# EAGLE board Mainboard - Prototyp 2 (EAGLE 7.2.0)
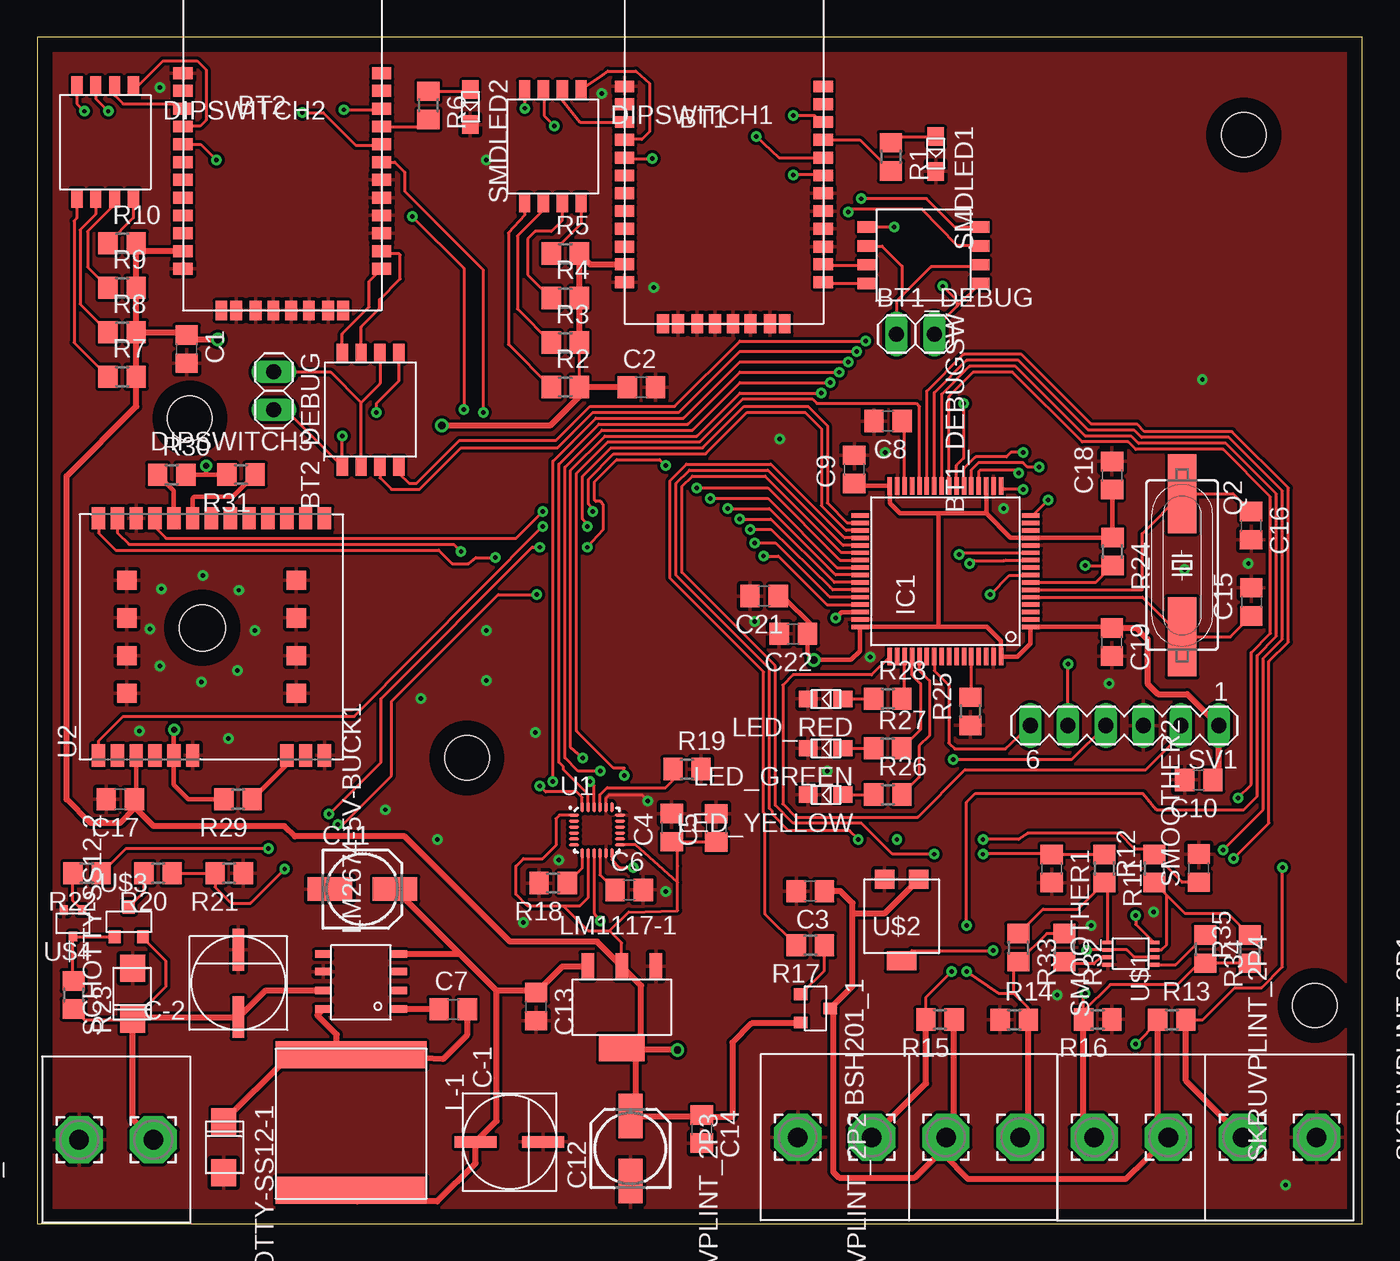
[diagram p0: board, top side]
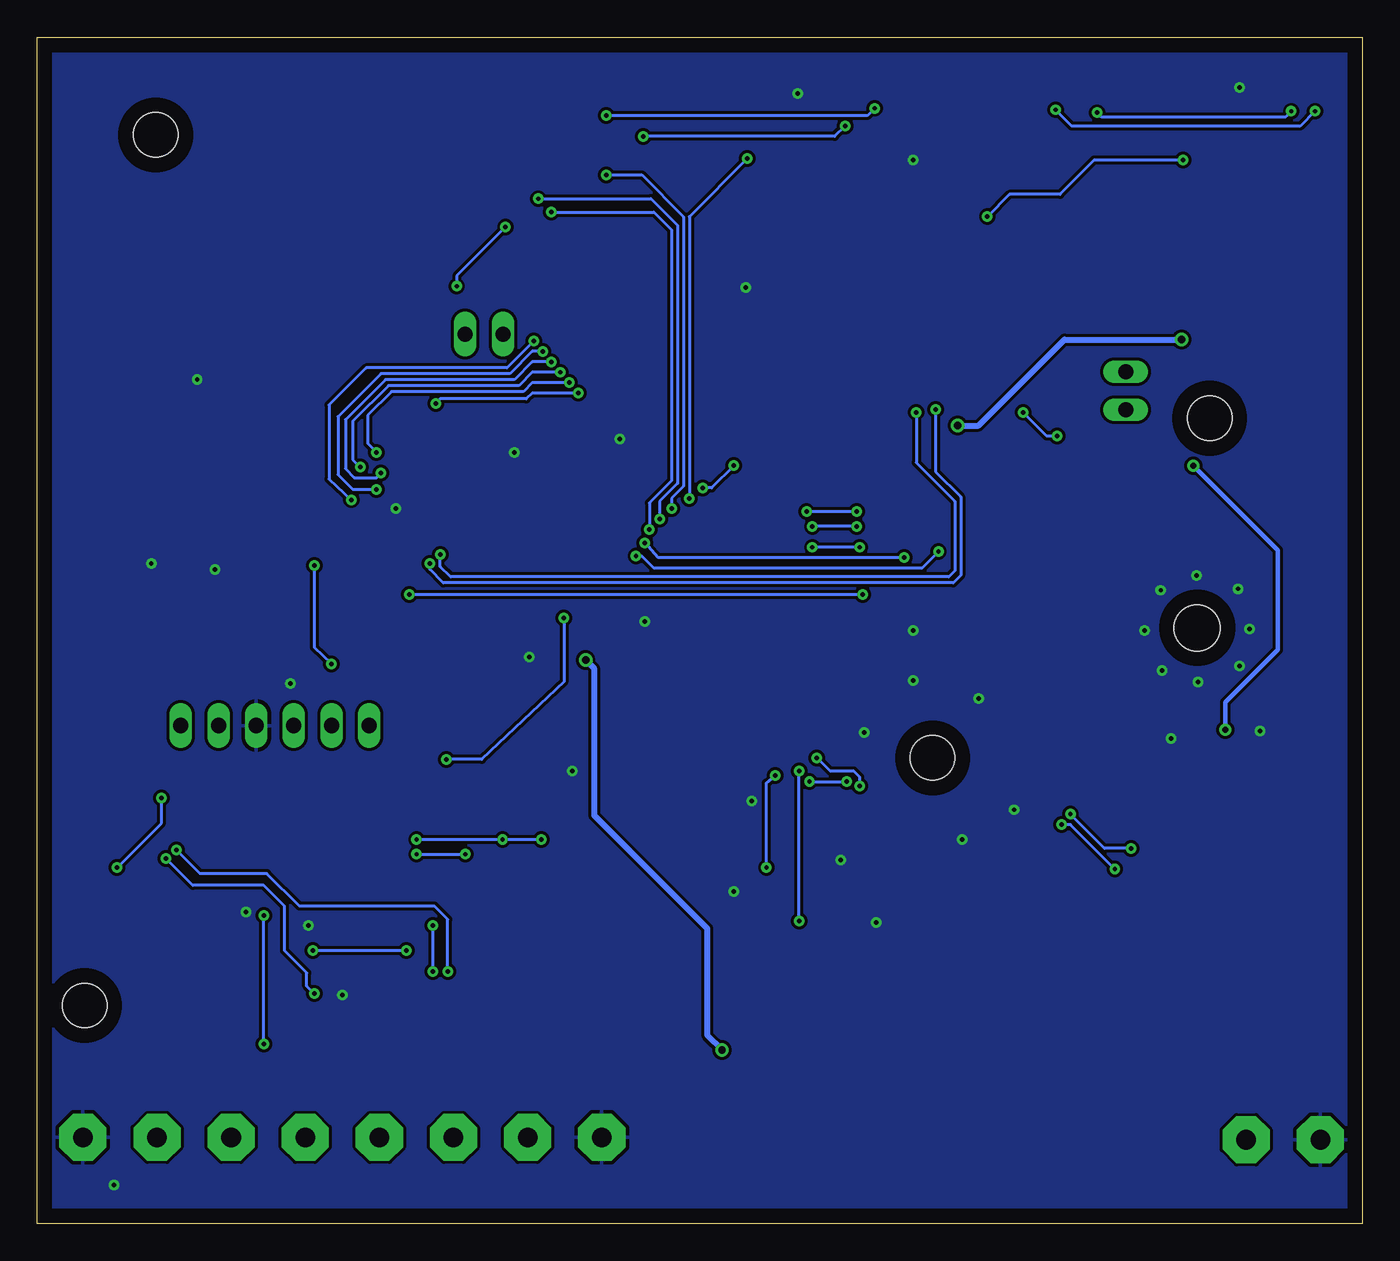
[diagram p1: board, bottom side, seen from below]

Size 89.4 x 80 mm. Coordinates in mm from the lower left corner, seen from the top.
Outline: 0,0 89.4,0 89.4,80 0,80 0,0
Copper layers (1*16): Top 0.035mm / dielectric 1.5mm / Bottom 0.035mm
Design rules "default *": minimum track width 0.2mm, minimum drill 0.3mm, track to track 0.2mm, track to pad 0.2mm, pad to pad 0.2mm, via to via 0.2mm, smd to smd 0mil, copper to edge 40mil, drill to drill 8mil, minimum pad ring 10mil, minimum via ring 8mil, stop-mask expansion 4mil, vias tented up to drill 0mil, thermal gap 10mil
Holes 3 mm at 29,31.4 81.4,73.4 86.2,14.7 10.3,54.3

## Footprints (pad centres in the part's own frame; a part is rotated, then mirrored left to right if it is on the bottom)
P-CHANNEL = smd 0.8 x 0.9: DRAIN 0,1; GATE -0.95,-1; SOURCE 0.95,-1
RN42 = smd 1.3 x 0.8: 1 -6.7,3.2; 2 -6.7,2; 3 -6.7,0.8; 4 -6.7,-0.4; 5 -6.7,-1.6; 6 -6.7,-2.8; 7 -6.7,-4; 8 -6.7,-5.2; 9 -6.7,-6.4; 10 -6.7,-7.6; 11 -6.7,-8.8; 12 -6.7,-10; 13 6.7,-10; 14 6.7,-8.8; 15 6.7,-7.6; 16 6.7,-6.4; 17 6.7,-5.2; 18 6.7,-4; 19 6.7,-2.8; 20 6.7,-1.6; 21 6.7,-0.4; 22 6.7,0.8; 23 6.7,2; 24 6.7,3.2 | smd 0.8 x 1.3: 28 3.1,-12.8; 29 -3.1,-12.8; 30 4.1,-12.8; 31 1.8,-12.8; 32 0.6,-12.8; 33 -0.6,-12.8; 34 -1.8,-12.8; 35 -4.1,-12.8
1X02 = drill 1.016 long: 1 -1.27,0; 2 1.27,0
DIPSWITCH4P = smd 0.76 x 1.27: B1 0,0; B2 1.27,0; B3 2.54,0; B4 3.81,0; T1 0,7.62; T2 1.27,7.62; T3 2.54,7.62; T4 3.81,7.62
C0805 = smd 1.3 x 1.5: 1 -0.95,0; 2 0.95,0
153CLV-0505 = smd 3 x 1.6: + 2.2,0; - -2.2,0
CAP-6.3MM-DIA = smd 0.8 x 2.8: + 0,2.3; - 0,-2.25
LQFP64 = smd 0.3 x 1.2: 1 -3.75,-5.75; 2 -3.25,-5.75; 3 -2.75,-5.75; 4 -2.25,-5.75; 5 -1.75,-5.75; 6 -1.25,-5.75; 7 -0.75,-5.75; 8 -0.25,-5.75; 9 0.25,-5.75; 10 0.75,-5.75; 11 1.25,-5.75; 12 1.75,-5.75; 13 2.25,-5.75; 14 2.75,-5.75; 15 3.25,-5.75; 16 3.75,-5.75; 33 3.75,5.75; 34 3.25,5.75; 35 2.75,5.75; 36 2.25,5.75; 37 1.75,5.75; 38 1.25,5.75; 39 0.75,5.75; 40 0.25,5.75; 41 -0.25,5.75; 42 -0.75,5.75; 43 -1.25,5.75; 44 -1.75,5.75; 45 -2.25,5.75; 46 -2.75,5.75; 47 -3.25,5.75; 48 -3.75,5.75 | smd 1.2 x 0.3: 17 5.75,-3.75; 18 5.75,-3.25; 19 5.75,-2.75; 20 5.75,-2.25; 21 5.75,-1.75; 22 5.75,-1.25; 23 5.75,-0.75; 24 5.75,-0.25; 25 5.75,0.25; 26 5.75,0.75; 27 5.75,1.25; 28 5.75,1.75; 29 5.75,2.25; 30 5.75,2.75; 31 5.75,3.25; 32 5.75,3.75; 49 -5.75,3.75; 50 -5.75,3.25; 51 -5.75,2.75; 52 -5.75,2.25; 53 -5.75,1.75; 54 -5.75,1.25; 55 -5.75,0.75; 56 -5.75,0.25; 57 -5.75,-0.25; 58 -5.75,-0.75; 59 -5.75,-1.25; 60 -5.75,-1.75; 61 -5.75,-2.25; 62 -5.75,-2.75; 63 -5.75,-3.25; 64 -5.75,-3.75
INDUCTOR = smd 1.8 x 10.16: 1 0,0; 2 9.14,0
SMD_LED_CUSTOM = smd 1.25 x 1.1: 1 0,0; 2 2.35,0
LM1117 = smd 0.84 x 1.8: ADJ/GND 0,0; INPUT 4.6,0; OUTPUT 2.3,0 | smd 3.1 x 1.8: OUTPUT2 2.3,5.5
LM2674 = smd 0.51 x 1.1: 1 0,0; 2 1.27,0; 3 2.54,0; 4 3.72,0; 5 3.72,5.1; 6 2.54,5.1; 7 1.27,5.1; 8 0,5.1
HC49UP = smd 5.334 x 1.93: 1 -4.826,0; 2 4.826,0
R0805 = smd 1.3 x 1.5: 1 -0.95,0; 2 0.95,0
SCHOTTY = smd 1.8 x 1.68: + 3.46,0; - 0,0
SKRUVPLINT_2P = drill 1.321 pad 3.175 octagon: 3 0,5; 4 0,0
MA06-1 = drill 1.016 long: 1 -6.35,0; 2 -3.81,0; 3 -1.27,0; 4 1.27,0; 5 3.81,0; 6 6.35,0
QFN40P300X300X105-25N = smd 0.7 x 0.2: 1 -1.55,1; 2 -1.55,0.6; 3 -1.55,0.2; 4 -1.55,-0.2; 5 -1.55,-0.6; 6 -1.55,-1; 13 1.55,-1; 14 1.55,-0.6; 15 1.55,-0.2; 16 1.55,0.2; 17 1.55,0.6; 18 1.55,1 | smd 0.2 x 0.7: 7 -1,-1.55; 8 -0.6,-1.55; 9 -0.2,-1.55; 10 0.2,-1.55; 11 0.6,-1.55; 12 1,-1.55; 19 1,1.55; 20 0.6,1.55; 21 0.2,1.55; 22 -0.2,1.55; 23 -0.6,1.55; 24 -1,1.55
XCVR_A2235-H = smd 1.5 x 0.9: 1 -8,7.62; 2 -8,6.35; 3 -8,5.08; 4 -8,3.81; 5 -8,2.54; 6 -8,1.27; 7 -8,-5.08; 8 -8,-6.35; 9 -8,-7.62; 10 8,-7.62; 11 8,-6.35; 12 8,-5.08; 13 8,-3.81; 14 8,-2.54; 15 8,-1.27; 16 8,0; 17 8,1.27; 18 8,2.54; 19 8,3.81; 20 8,5.08; 21 8,6.35; 22 8,7.62 | smd 1.3 x 1.3: 23 -3.81,5.715; 24 -1.27,5.715; 25 1.27,5.715; 26 3.81,5.715; 27 -3.81,-5.715; 28 -1.27,-5.715; 29 1.27,-5.715; 30 3.81,-5.715 | hole 3.1: 0.605,0.63
VSSOP = smd 0.25 x 0.75: P$1 -0.75,-1.55; P$2 -0.25,-1.55; P$3 0.25,-1.55; P$4 0.75,-1.55; P$5 0.75,1.55; P$6 0.25,1.55; P$7 -0.25,1.55; P$8 -0.75,1.55
POT = smd 1.3 x 1.3: P$1_A 1.15,0; P$3_C -1.15,0 | smd 2 x 1.3: P$2_B 0,5.5
SOT-323 = smd 0.559 x 0.648: DRAIN 0,0.895; GATE -0.623,-0.895; SOURCE 0.623,-0.895

## Placement (x,y rotation side)
BSH201_1  BSH201  [P-CHANNEL]  52.5,14.5 270 top
BT1  BLUETOOTH-RN42  [RN42]  46.33,73.47 0 top
BT1_DEBUG  [1X02]  59.25,59.97 0 top
BT1_DEBUGSW  DIPSWITCH_4P  [DIPSWITCH4P]  55.98,67.19 270 top
BT2  BLUETOOTH-RN42  [RN42]  16.54,74.37 0 top
BT2_DEBUG  [1X02]  15.97,56.15 270 top
C1  100n  [C0805]  10.09,58.96 270 top
C2  100n  [C0805]  40.76,56.39 0 top
C3  100n  [C0805]  52.16,22.41 180 top
C4  100n  [C0805]  42.81,26.69 90 top
C5  10n  [C0805]  45.81,26.68 90 top
C6  100n  [C0805]  39.94,22.49 0 top
C7  0.01uF  [C0805]  28.07,14.44 0 top
C8  4u7  [C0805]  57.4,54.11 180 top
C9  100n  [C0805]  55.12,50.85 90 top
C10  100n  [C0805]  78.36,29.91 180 top
C11  10u  [153CLV-0505]  21.94,22.55 0 top
C12  10u  [153CLV-0505]  40.03,5.06 90 top
C13  100n  [C0805]  33.66,14.62 270 top
C14  100n  [C0805]  44.83,6.37 270 top
C15  25p  [C0805]  81.91,41.92 90 top
C16  25p  [C0805]  81.89,47.06 270 top
C17  100n  [C0805]  5.61,28.61 180 top
C18  100n  [C0805]  72.51,50.44 90 top
C19  100n  [C0805]  72.49,39.21 270 top
C21  1u  [C0805]  49.04,42.31 180 top
C22  100n  [C0805]  51.01,39.76 180 top
C-1  100uF  [CAP-6.3MM-DIA]  31.88,5.5 90 top
C-2  100uF  [CAP-6.3MM-DIA]  13.58,16.21 180 top
DIPSWITCH1  DIPSWITCH_4P  [DIPSWITCH4P]  32.88,68.82 0 top
DIPSWITCH2  DIPSWITCH_4P  [DIPSWITCH4P]  2.69,69.12 0 top
DIPSWITCH3  DIPSWITCH_4P  [DIPSWITCH4P]  24.4,58.68 180 top
IC1  STM32F401RBT  [LQFP64]  61.27,43.98 90 top
L-1  55uH  [INDUCTOR]  21.19,11.38 270 top
LED_GREEN  SMD_LED  [SMD_LED_CUSTOM]  54.36,32.05 180 top
LED_RED  SMD_LED  [SMD_LED_CUSTOM]  54.36,35.37 180 top
LED_YELLOW  SMD_LED  [SMD_LED_CUSTOM]  54.36,28.92 180 top
LM1117-1  LM1117  [LM1117]  41.74,17.34 180 top
LM2674-5V-BUCK1  LM2674-5VBUCK  [LM2674]  24.4,14.45 90 top
Q2  18p  [HC49UP]  77.23,44.39 270 top
R1  220  [R0805]  57.59,71.92 270 top
R2  1k  [R0805]  35.63,56.4 0 top
R3  1k  [R0805]  35.63,59.4 0 top
R4  1k  [R0805]  35.63,62.4 0 top
R5  1k  [R0805]  35.63,65.4 0 top
R6  220  [R0805]  26.39,75.4 270 top
R7  1k  [R0805]  5.74,57.1 0 top
R8  1k  [R0805]  5.74,60.1 0 top
R9  1k  [R0805]  5.74,63.1 0 top
R10  1k  [R0805]  5.74,66.1 0 top
R11  1k  [R0805]  71.99,23.94 270 top
R12  1k  [R0805]  75.36,23.94 90 top
R13  68  [R0805]  76.54,13.74 0 top
R14  4.7k  [R0805]  65.91,13.74 0 top
R15  68  [R0805]  60.91,13.76 180 top
R16  4.7k  [R0805]  71.54,13.76 180 top
R17  150  [R0805]  52.16,18.76 180 top
R18  0  [R0805]  34.81,22.96 180 top
R19  0  [R0805]  43.84,30.64 0 top
R20  6.8k  [R0805]  8.16,23.62 180 top
R21  3.3k  [R0805]  12.96,23.61 180 top
R22  1k  [R0805]  3.37,23.62 180 top
R23  10k  [R0805]  2.48,15.41 270 top
R24  10k  [R0805]  72.54,45.31 270 top
R25  10k  [R0805]  62.96,34.54 90 top
R26  220  [R0805]  57.39,28.92 0 top
R27  220  [R0805]  57.38,32.04 0 top
R28  220  [R0805]  57.39,35.39 0 top
R29  10k  [R0805]  13.56,28.61 180 top
R30  2k2  [R0805]  9.09,50.49 0 top
R31  2k2  [R0805]  13.76,50.51 180 top
R32  1k  [R0805]  69.3,18.6 270 top
R33  10k  [R0805]  66.2,18.6 270 top
R34  1k  [R0805]  78.8,18.5 270 top
R35  10k  [R0805]  81.8,18.5 90 top
SCHOTTY-SS12-1  SCHOTTY-SS12  [SCHOTTY]  12.6,6.88 270 top
SCHOTTY-SS12-2  SCHOTTY-SS12  [SCHOTTY]  6.46,13.75 90 top
SKRUVPLINT_2P1  SKRUVPLINT_2P  [SKRUVPLINT_2P]  86.31,5.81 90 top
SKRUVPLINT_2P2  SKRUVPLINT_2P  [SKRUVPLINT_2P]  61.31,5.81 270 top
SKRUVPLINT_2P3  SKRUVPLINT_2P  [SKRUVPLINT_2P]  51.31,5.81 270 top
SKRUVPLINT_2P4  SKRUVPLINT_2P  [SKRUVPLINT_2P]  76.31,5.81 90 top
SKRUVPLINT_2P5  SKRUVPLINT_2P  [SKRUVPLINT_2P]  2.84,5.65 270 top
SMDLED1  SMD_LED  [SMD_LED_CUSTOM]  60.62,73.29 270 top
SMDLED2  SMD_LED  [SMD_LED_CUSTOM]  29.22,76.45 270 top
SMOOTHER1  1n  [C0805]  68.44,23.94 270 top
SMOOTHER2  1n  [C0805]  78.36,23.96 90 top
SV1  [MA06-1]  73.35,33.58 180 top
U1  MPU-9250  [QFN40P300X300X105-25N]  37.77,26.53 0 top
U2  A2235-H  [XCVR_A2235-H]  11.77,39.56 90 top
U$1  TLV7256  [VSSOP]  73.77,18.2 270 top
U$2  TS53YL  [POT]  58.32,23.22 180 top
U$3  ZXMP10A13F  [P-CHANNEL]  6.19,20.34 0 top
U$4  SI1330EDL  [SOT-323]  2.42,20.24 180 top

## Library data of the parts
BSH201_1 = BSH201
BT1 BT2 = RN42
BT1_DEBUG BT2_DEBUG = pinhead
BT1_DEBUGSW DIPSWITCH1-DIPSWITCH3 = dipswitch4p_updated
C1-C19 C21 C22 R11-R25 R29-R35 SMOOTHER1 SMOOTHER2 = rcl
C-1 C-2 = panasonic-cap-100u
IC1 = E7020E
L-1 = inductor-55u
LED_GREEN LED_RED LED_YELLOW SMDLED1 SMDLED2 = greenled_smd
LM1117-1 = LM1117-3v3_vreg
LM2674-5V-BUCK1 = LM2674-5v-buck
Q2 = crystal; OC_FARNELL: unknown; OC_NEWARK: unknown
R1-R10 R26-R28 = resistor
SCHOTTY-SS12-1 SCHOTTY-SS12-2 = schotty-SS12
SKRUVPLINT_2P1-SKRUVPLINT_2P5 = skruvplint2p_CTB0700
SV1 = E7020E; OC_FARNELL: unknown; OC_NEWARK: unknown
U1 = MPU-9250; AVAILABILITY: Good; DESCRIPTION: SMD Gyroscope/Accelerometer/Magnetometer Sensor; 9-AXIS; MF: InvenSense; MP: MPU-9250; PACKAGE: QFN-24 InvenSense; PRICE: 6.71 USD
U2 = A2235-H; AVAILABILITY: Good; DESCRIPTION: Gps Module, Mini Outline w/ Ant; MF: Maestro Wireless; MP: A2235H; PACKAGE: None; PRICE: 15.70 USD
U$1 = TLV7256
U$2 = TS53YL
U$3 = ZXMP10A13F
U$4 = SI1330EDL

## Nets
1V8_VOUT: R29.2 R30.2 R31.2 U2.5
+3V3: BSH201_1.SOURCE BT1.11 BT2.11 C1.1 C2.1 C4.1 C5.1 C9.1 C10.1 C12.+ C14.1 C17.1 C18.1 C19.1 C21.1 C22.1 IC1.1 IC1.13 IC1.19 IC1.32 IC1.48 IC1.64 LM1117-1.OUTPUT LM1117-1.OUTPUT2 R2.2 R3.2 R4.2 R5.2 R7.2 R8.2 R9.2 R10.2 R24.1 SV1.1 U1.1 U1.8 U1.13 U2.3
+5V: C11.+ C13.1 C-1.+ L-1.2 LM1117-1.INPUT LM2674-5V-BUCK1.4
BAT_MEAS: IC1.8 R20.1 R21.2
BATMEAS_TOGGLE: IC1.39 R22.1
BATSUP: C-2.+ LM2674-5V-BUCK1.7 R23.2 SCHOTTY-SS12-2.- SKRUVPLINT_2P5.3 U$3.SOURCE
BT1_CONNSTATUS: BT1.19 IC1.41
BT1_DEBUGRX: BT1_DEBUG.2 BT1_DEBUGSW.B1 BT1_DEBUGSW.T4
BT1_DEBUGTX: BT1_DEBUG.1 BT1_DEBUGSW.B2 BT1_DEBUGSW.T3
BT1_GPIO3: BT1.20 DIPSWITCH1.T2
BT1_GPIO4: BT1.22 DIPSWITCH1.T1
BT1_GPIO6: BT1.3 DIPSWITCH1.T3
BT1_GPIO7: BT1.4 DIPSWITCH1.T4
BT1_RESET: BT1.5 IC1.40
BT1_RX: BT1.13 BT1_DEBUGSW.B4
BT1_TX: BT1.14 BT1_DEBUGSW.B3
BT2_CONNSTATUS: BT2.19 IC1.11
BT2_DEBUGRX: BT2_DEBUG.2 DIPSWITCH3.B1 DIPSWITCH3.T4
BT2_DEBUGTX: BT2_DEBUG.1 DIPSWITCH3.B2 DIPSWITCH3.T3
BT2_GPIO3: BT2.20 DIPSWITCH2.T2
BT2_GPIO4: BT2.22 DIPSWITCH2.T1
BT2_GPIO6: BT2.3 DIPSWITCH2.T3
BT2_GPIO7: BT2.4 DIPSWITCH2.T4
BT2_RESET: BT2.5 IC1.10
BT2_RX: BT2.13 DIPSWITCH3.B4
BT2_TX: BT2.14 DIPSWITCH3.B3
GND: BT1.1 BT1.12 BT1.15 BT1.16 BT1.17 BT1.18 BT1.28 BT1.29 BT1.31 BT1.32 BT1.33 BT1.34 BT2.1 BT2.12 BT2.15 BT2.16 BT2.17 BT2.18 BT2.28 BT2.29 BT2.31 BT2.32 BT2.33 BT2.34 C1.2 C2.2 C3.2 C4.2 C5.2 C6.2 C8.2 C9.2 C10.2 C11.- C12.- C13.2 C14.2 C15.2 C16.2 C17.2 C18.2 C19.2 C21.2 C22.2 C-1.- C-2.- IC1.12 IC1.18 IC1.31 IC1.47 IC1.63 LED_GREEN.2 LED_RED.2 LED_YELLOW.2 LM1117-1.ADJ/GND LM2674-5V-BUCK1.6 R14.1 R16.1 R18.2 R19.2 R21.1 R25.1 SCHOTTY-SS12-1.+ SCHOTTY-SS12-2.+ SKRUVPLINT_2P1.4 SKRUVPLINT_2P3.4 SKRUVPLINT_2P5.4 SMDLED1.2 SMDLED2.2 SMOOTHER1.2 SMOOTHER2.2 SV1.3 U1.11 U1.18 U1.20 U2.6 U2.9 U2.20 U2.23 U2.24 U2.25 U2.26 U2.27 U2.28 U2.29 U2.30 U$1.P$4 U$2.P$1_A U$4.SOURCE
GPS_NRST: IC1.34 U2.1
GPS_TOGGLE: IC1.35 U2.19
IMU_INT: IC1.28 U1.12
LED_GREEN: IC1.52 R27.2
LED_RED: IC1.51 R28.2
LED_YELLOW: IC1.53 R26.2
MCURX1_BT1TX: BT1_DEBUGSW.T2 IC1.43
MCURX2_BT2TX: DIPSWITCH3.T2 IC1.17
MCURX6_GPSTX: IC1.45 U2.21
MCUTX1_BT1RX: BT1_DEBUGSW.T1 IC1.42
MCUTX2_BT2RX: DIPSWITCH3.T1 IC1.16
MCUTX6_GPSRX: IC1.44 U2.22
N$1: BT1.21 R1.2
N$2: DIPSWITCH1.B1 R2.1
N$3: DIPSWITCH1.B2 R3.1
N$4: DIPSWITCH1.B3 R4.1
N$5: DIPSWITCH1.B4 R5.1
N$6: BT2.21 R6.2
N$7: DIPSWITCH2.B1 R7.1
N$8: DIPSWITCH2.B2 R8.1
N$9: DIPSWITCH2.B3 R9.1
N$10: DIPSWITCH2.B4 R10.1
N$11: R6.1 SMDLED2.1
N$12: R1.1 SMDLED1.1
N$13: R11.2 R33.1 U$1.P$1
N$14: U$1.P$2 U$1.P$6 U$2.P$2_B
N$15: R12.1 R35.2 U$1.P$7
N$16: R29.1 U2.7
N$17: R30.1 U2.18
N$18: BSH201_1.GATE R17.1
N$19: C6.1 U1.10
N$20: R18.1 U1.7
N$21: R19.1 U1.21
N$22: C7.1 LM2674-5V-BUCK1.1
N$23: R20.2 U$3.DRAIN
N$24: R22.2 U$4.GATE
N$25: R23.1 U$3.GATE U$4.DRAIN
N$26: C8.1 IC1.30
N$27: IC1.60 R25.2
N$28: C15.1 IC1.5 Q2.2
N$29: C16.1 IC1.6 Q2.1
N$30: LED_YELLOW.1 R26.1
N$31: LED_GREEN.1 R27.1
N$32: R31.1 U2.17
N$33: LED_RED.1 R28.1
N$34: R32.2 U$1.P$3
N$35: R34.1 U$1.P$5
NRST: IC1.7 R24.2 SV1.5
OPTO1_DIODE: IC1.24 R13.2 SKRUVPLINT_2P1.3
OPTO1_OUT: IC1.38 R11.1 SMOOTHER1.1
OPTO1_TRAN: IC1.25 R14.2 R32.1 R33.2 SKRUVPLINT_2P2.3
OPTO2_DIODE: IC1.26 R15.2 SKRUVPLINT_2P3.3
OPTO2_OUT: IC1.37 R12.2 SMOOTHER2.1
OPTO2_TRAN: IC1.27 R16.2 R34.2 R35.1 SKRUVPLINT_2P4.3
OPTO_TOGGLE: IC1.36 R17.2
OPTO_VDD: BSH201_1.DRAIN C3.1 R13.1 R15.1 SKRUVPLINT_2P2.4 SKRUVPLINT_2P4.4 U$1.P$8 U$2.P$3_C
RESV: U1.19
SPI1_MISO: IC1.22 U1.9
SPI1_MOSI: IC1.23 U1.24
SPI1_NSS: IC1.20 U1.22
SPI1_SCK: IC1.21 U1.23
SWCLK: IC1.49 SV1.2
SWDIO: IC1.46 SV1.4
SWO: IC1.55 SV1.6
VANT: U2.11
VOUT: C7.2 L-1.1 LM2674-5V-BUCK1.8 SCHOTTY-SS12-1.-

## Tracks (layer width: path | path; a pad name or v marks a point on that pad's centre or on a via)
1V8_VOUT  (via drill 0.4)
  Top 0.3: R29.2 10.19,28.61 9.23,29.57 U2.5 | 9.4,31.39 U2.5 | U2.5 v9.23,33.28 v9.24,33.29 | 11.4,50.49 R30.2 10.09,50.49 10.1,50.5 | 11.4,50.49 12.79,50.49 R31.2 | v11.4,51.1 11.4,50.49
  Bottom 0.3: v9.24,33.29 9.24,35.16 5.7,38.7 5.7,45.4 v11.4,51.1
+3V3  (via drill 0.5)
  Top 0.2: 72.51,46.23 R24.1 | 72.54,49.46 C18.1 | 72.42,40.23 C19.1 | 38.63,19.73 37.17,19.73 35.5,21.4 | 38.63,19.73 39.9,21 43.2,21.1 43.2,23 | U1.8 37.17,21.97 36.6,21.4 35.5,21.4 | 35.5,21.4 33.1,21.4 32.3,22.2 32.3,24.1 32.8,24.6 34.1,24.6 35,25.5 35,27.3 35.23,27.53 U1.1 | 43.2,23 40.37,25.53 U1.13 | 43.2,23 43.21,24.11 43.21,25.34 C4.1 C5.1 | LM1117-1.OUTPUT 39.44,18.92 38.63,19.73 | R2.2 R3.2
  Top 0.3: 72.51,46.23 IC1.13 65.67,46.23 64.02,47.88 | R24.1 72.54,49.46 | 72.42,40.23 IC1.1 67,40.21 67,39.1 66.13,38.23 IC1.64 65.02,39.28 64.07,40.23 60.8,40.23 | IC1.19 64.02,47.88 | 64.02,47.88 64,47.9 60.8,47.9 | 60.8,40.23 IC1.48 55.5,40.21 55.5,38.6 54.9,38 v52.4,38 51.96,38.44 C22.1 52.36,40.23 50.28,42.31 C21.1 | U2.3 6.69,28.74 C17.1 | 60.8,47.9 58.2,47.9 57.52,48.58 IC1.32 55.29,49.73 C9.1 | 60.8,47.9 60.8,40.23
  Top 0.4: 40.03,11.25 LM1117-1.OUTPUT2 40.2,11.84 | C14.1 44.95,7.2 | R3.2 R4.2 R5.2 37.31,64.67 BT1.11 | R2.2 36.61,56.37 | C10.1 79.7,30.3 SV1.1 77.58,35.7 75.6,35.7 74.9,36.4 74.9,39.4 74.14,40.16 C19.1 | 6.56,28.1 C17.1 | 6.56,28.1 7.86,26.8 16.7,26.8 17.4,26.1 24.8,26.1 31.9,19 37.78,19 LM1117-1.OUTPUT 40.74,16.04 40.74,11.84 40.5,11.84 | 6.56,28.1 6.56,27.96 5.6,27 3.6,27 2,28.6 2,50.4 6.7,55.1 R7.2 R8.2 | R8.2 R9.2 R10.2 7.22,65.57 BT2.11 | 40.2,11.84 40.5,11.84 | 52.4,40.12 C22.1 | v43.2,11.7 40.34,11.7 40.2,11.84 | C2.1 R2.2 | R2.2 36.58,55.78 34.6,53.8 v27.3,53.8 | 40.5,11.84 40.39,11.73 40.39,7.32 C12.+ 40.09,7.2 44.95,7.2 | 44.95,7.2 46.9,7.2 46.9,12.2 48.2,13.5 51.45,13.5 BSH201_1.SOURCE | R8.2 10.09,60.1 C1.1 10.09,59.6 v12.2,59.6
  Bottom 0.4: v52.4,38 51.8,37.4 51.8,27.5 44.2,19.9 44.2,12.7 v43.2,11.7 | v12.2,59.6 20.1,59.6 25.9,53.8 v27.3,53.8
+5V
  Top 0.4: 31,15.7 31,6.92 C-1.+ 29.58,4.08 27,1.5 21.6,1.5 21.19,1.91 L-1.2 | 31,15.7 28.53,18.17 | 28.53,18.17 LM2674-5V-BUCK1.4 | 28.53,18.17 C11.+ | 31,15.7 33.53,15.7 C13.1 35.43,17.34 LM1117-1.INPUT
BAT_MEAS  (via drill 0.3)
  Top 0.2: R20.1 R21.2 12.01,22.69 13.1,21.6 14.4,21.6 v16.7,23.9 | v20.3,26.9 20.6,26.9 23.9,30.2 23.9,35.2 31.1,42.4 v33.7,42.4 | v64.3,42.4 65.6,43.7 66.99,43.7 IC1.8
  Bottom 0.2: v16.7,23.9 19.7,26.9 v20.3,26.9 | v33.7,42.4 v64.3,42.4
BATMEAS_TOGGLE  (via drill 0.3)
  Top 0.2: R22.1 6,25.3 v15.6,25.3 | v19.7,27.6 23.2,31.1 23.2,35.4 33.4,45.6 v33.9,45.6 | v37.1,45.6 38.2,46.8 38.2,48.4 38,48.7 37.7,48.7 37.6,48.8 37.6,50 39.1,51.5 42,51.5 v42.4,51.1 | v44.5,49.6 49.3,49.6 54.17,44.73 IC1.39
  Bottom 0.2: v15.6,25.3 17.4,25.3 v19.7,27.6 | v33.9,45.6 v37.1,45.6 | v42.4,51.1 43.9,49.6 v44.5,49.6
BATSUP
  Top 0.2: 5.75,14.46 SCHOTTY-SS12-2.- 3.19,13.75 R23.2 | U$3.SOURCE 7.14,19.26 8.7,17.7 8.7,15.99 6.62,13.91
  Top 0.4: LM2674-5V-BUCK1.7 15.42,15.72 13.6,13.9 C-2.+ 6.62,13.91 SCHOTTY-SS12-2.- 6.46,7.03 SKRUVPLINT_2P5.3
BT1_CONNSTATUS  (via drill 0.3)
  Top 0.2: BT1.19 53,70.7 v51,70.7 | v46.6,48.2 49.4,48.2 53.87,43.73 IC1.41
  Bottom 0.2: v51,70.7 48.6,70.7 45.8,67.9 45.8,49.7 46.6,48.9 v46.6,48.2
BT1_DEBUGRX  (via drill 0.3)
  Top 0.2: BT1_DEBUGSW.T4 62.06,61.84 | 62.06,61.84 60.52,60.3 BT1_DEBUG.2 | BT1_DEBUGSW.B1 v57.8,67.2 | v61.1,63.2 62.06,62.24 62.06,61.84
  Bottom 0.2: v57.8,67.2 61.1,63.9 v61.1,63.2
BT1_DEBUGTX
  Top 0.2: 58.35,62.55 60.3,64.5 63.45,64.5 arc90 BT1_DEBUGSW.T3 | 58.35,62.55 57.98,62.18 BT1_DEBUG.1 | BT1_DEBUGSW.B2 56,65.9 57,65.9 58.35,64.55 58.35,62.55
BT1_GPIO3  (via drill 0.3)
  Top 0.2: DIPSWITCH1.T2 34.2,76.39 34.2,74.7 v34.9,74 | v48.5,73.3 50.03,71.87 BT1.20
  Bottom 0.2: v34.9,74 35.6,73.3 v48.5,73.3
BT1_GPIO4  (via drill 0.3)
  Top 0.2: DIPSWITCH1.T1 32.9,76.42 v32.9,75.2 | BT1.22 52.96,74.2 52.46,74.7 v51,74.7
  Bottom 0.2: v32.9,75.2 33.4,74.7 v51,74.7
BT1_GPIO6
  Top 0.2: DIPSWITCH1.T3 35.42,75.78 36.63,74.27 BT1.3
BT1_GPIO7
  Top 0.2: DIPSWITCH1.T4 38.14,77.44 38.5,77.7 40.4,77.7 41.3,76.9 41.3,73.6 40.8,73.1 39.66,73.1 BT1.4
BT1_RESET  (via drill 0.3)
  Top 0.2: BT1.5 39.7,71.8 v41.5,71.8 | v45.4,48.9 49.3,48.9 53.97,44.23 IC1.40
  Bottom 0.2: v41.5,71.8 45.4,67.9 v45.4,48.9
BT1_RX
  Top 0.2: BT1_DEBUGSW.B4 55.96,63.4 53.1,63.4 BT1.13
BT1_TX
  Top 0.2: BT1_DEBUGSW.B3 55.93,64.6 53.1,64.6 BT1.14
BT2_CONNSTATUS  (via drill 0.3)
  Top 0.2: BT2.19 24.13,71.57 24.8,70.9 24.8,69.6 30.1,64.3 v30.1,54.7 | v62.2,45.1 62.33,45.23 IC1.11
  Bottom 0.2: v30.1,54.7 30.1,51.3 27.5,48.7 27.5,44 27.9,43.6 61.5,43.6 62.2,44.3 v62.2,45.1
BT2_DEBUGRX  (via drill 0.3)
  Top 0.2: BT2_DEBUG.2 16.77,54.88 DIPSWITCH3.T4 v20.59,53.09 v20.6,53.1 | v22.9,54.7 22.9,55.3 24.4,56.8 DIPSWITCH3.B1
  Bottom 0.2: v20.6,53.1 21.3,53.1 v22.9,54.7
BT2_DEBUGTX
  Top 0.2: DIPSWITCH3.T3 21.86,55.36 | 21.86,55.36 23.13,56.63 DIPSWITCH3.B2 | BT2_DEBUG.1 19.8,57.42 21.86,55.36
BT2_GPIO3  (via drill 0.3)
  Top 0.2: DIPSWITCH2.T2 3.96,75.84 v4.8,75 | v17.9,74.9 19.3,74.9 21.5,72.7 23.17,72.7 BT2.20
  Bottom 0.2: v4.8,75 5.2,74.6 17.6,74.6 v17.9,74.9
BT2_GPIO4  (via drill 0.3)
  Top 0.2: DIPSWITCH2.T1 2.69,75.51 v3.2,75 | v20.7,75.1 23.17,75.1 BT2.22
  Bottom 0.2: v3.2,75 4.2,74 19.6,74 v20.7,75.1
BT2_GPIO6
  Top 0.2: DIPSWITCH2.T3 5.23,76.07 5.8,75.5 9.51,75.5 BT2.3
BT2_GPIO7
  Top 0.2: 6.5,76.9 DIPSWITCH2.T4 6.84,76.74 8.5,78.4 10.8,78.4 11.4,77.8 11.4,74.4 11,74 9.87,74 BT2.4
BT2_RESET  (via drill 0.3)
  Top 0.2: BT2.5 11.03,72.77 v12.1,71.7 | v25.3,67.9 28.8,64.4 v28.8,54.9 | v62.9,44.5 63.2,44.7 65.2,44.7 65.33,44.73 IC1.10
  Bottom 0.2: v12.1,71.7 18.1,71.7 20.4,69.4 23.8,69.4 v25.3,67.9 | v28.8,54.9 28.8,50.7 27.1,49 27.1,43.7 27.6,43.2 62,43.2 62.9,44.1 v62.9,44.5
BT2_RX
  Top 0.2: DIPSWITCH3.B4 20.59,59.99 22.4,61.8 22.4,63.53 BT2.13
BT2_TX
  Top 0.2: DIPSWITCH3.B3 21.86,60.46 23.1,61.7 23.1,62.3 24.5,63.7 24.5,65.3 24.4,65.4 23.41,65.4 BT2.14
GND  (via drill 0.3)
  Top 0.2: U1.20 38.37,28.67 38.6,28.9 40.8,28.9 v41.2,28.5
  other vias: 30.3,71.7 38.1,76.2 6.9,33.2 12.9,32.7 30.3,36.6 25.9,35.4 30.3,40 33.6,33.1 27,25.9 23.5,27.9 32.8,20.3 35.2,24.5 53.3,30.5 48.4,40.6 42.4,22.4 71.1,20.1 75.3,21 56.2,38.2 72.3,36.4 81.7,44.5 57.2,52 65.2,48.2 50.1,52.9 11.1,36.5 11.2,43.7 14.7,40 7.6,40.1 13.6,42.7 8.3,37.6 8.4,42.8 13.5,37.3 77.4,44.1 8.3,76.6 41.6,63.1 68.8,15.4 84.2,2.6 78.6,56.9
  pour Top: 0,80 0,0 89.4,0.1 89.4,80.1
  pour Bottom: 0,80 0,0 89.4,0.1 89.4,80.1
GPS_NRST  (via drill 0.3)
  Top 0.2: U2.1 4.15,32.55 5.8,34.2 21.4,34.2 v34.1,47 | v37.1,47 37.1,47.2 36.8,47.5 36.8,50.4 38.7,52.3 44.9,52.3 47.7,55.1 52,55.1 53.3,53.8 53.3,48.6 54.67,47.23 IC1.34
  Bottom 0.2: v34.1,47 v37.1,47
GPS_TOGGLE  (via drill 0.3)
  Top 0.2: U2.19 7.96,46.94 8.7,46.2 32.3,46.2 v34.1,48 | v37.5,48 37.5,48.2 37.2,48.5 37.2,50.2 38.9,51.9 45.1,51.9 47.9,54.7 51.8,54.7 52.9,53.6 52.9,48.4 54.57,46.73 IC1.35
  Bottom 0.2: v34.1,48 v37.5,48
IMU_INT  (via drill 0.3)
  Top 0.2: U1.12 38.77,24.53 39.3,24 v40.2,24 | v39.6,30.2 39.6,30.7 38.9,30.7 36.4,33.2 36.4,50.6 38.5,52.7 44.7,52.7 47.6,55.6 52.3,55.6 52.6,55.3 59.3,55.3 59.52,55.08 IC1.28
  Bottom 0.2: v40.2,24 40.2,29.7 v39.6,30.2
LED_GREEN
  Top 0.2: R27.2 59.6,33.31 59.6,36.4 59.02,36.98 IC1.52
LED_RED
  Top 0.2: R28.2 58.52,35.57 IC1.51
LED_YELLOW
  Top 0.2: R26.2 59.5,30.08 59.5,32.2 60.2,32.9 60.2,36.6 59.52,37.28 IC1.53
MCURX1_BT1TX  (via drill 0.3)
  Top 0.2: 64.08,65.92 BT1_DEBUGSW.T2 62.08,65.92 59.7,68.4 55,68.4 v54.7,68.2 | v48.1,46.8 49.5,46.8 53.5,42.9 53.67,42.73 IC1.43
  Bottom 0.2: v54.7,68.2 47.8,68.2 46.6,67 46.6,50.1 48.1,48.6 v48.1,46.8
MCURX2_BT2TX  (via drill 0.3)
  Top 0.2: DIPSWITCH3.T2 23.13,50.27 23.9,49.5 25.8,49.5 28.6,52.3 35.1,52.3 37.5,54.7 43.3,54.7 47.4,58.8 v55.3,58.8 | v66.5,49.5 65.25,49.5 IC1.17
  Bottom 0.2: v55.3,58.8 56,58.8 57.5,57.3 66.2,57.3 69.1,54.4 69.1,50.5 68.1,49.5 v66.5,49.5
MCURX6_GPSTX  (via drill 0.3)
  Top 0.2: U2.21 5.42,46.58 6.2,45.8 28.1,45.8 v28.6,45.3 | v49,45 50,45 53.27,41.73 IC1.45
  Bottom 0.2: v28.6,45.3 29.7,44.2 47.8,44.2 48.6,45 v49,45
MCUTX1_BT1RX  (via drill 0.3)
  Top 0.2: 63.91,67.19 BT1_DEBUGSW.T1 61.91,67.19 60,69.1 v55.6,69.1 | v47.4,47.5 49.5,47.5 53.77,43.23 IC1.42
  Bottom 0.2: v55.6,69.1 48,69.1 46.2,67.3 46.2,49.9 47.4,48.7 v47.4,47.5
MCUTX2_BT2RX  (via drill 0.3)
  Top 0.2: DIPSWITCH3.T1 24.4,50.6 25.1,49.9 25.6,49.9 28.5,52.8 35,52.8 37.3,55.1 43,55.1 47.4,59.5 v55.9,59.5 | 67.05,47.7 IC1.16 67.13,47.73 v68.2,48.8
  Bottom 0.2: v55.9,59.5 57.7,57.7 67.2,57.7 69.7,55.2 69.7,50.2 v68.2,48.8
MCUTX6_GPSRX  (via drill 0.3)
  Top 0.2: U2.22 4.15,46.55 5.3,45.4 27.1,45.4 28,44.5 29.1,44.5 29.6,44.9 v30.9,44.9 | v48.4,45.9 49.8,45.9 53.47,42.23 IC1.44
  Bottom 0.2: v30.9,44.9 47.5,44.9 v48.4,45.9
N$1
  Top 0.2: BT1.21 55.49,73.07 R1.2
N$2
  Top 0.2: DIPSWITCH1.B1 32.88,67.98 31.8,66.8 31.8,59.28 R2.1
N$3
  Top 0.2: DIPSWITCH1.B2 34.15,68.35 32.4,66.6 32.4,61.68 R3.1
N$4
  Top 0.2: DIPSWITCH1.B3 35.42,67.62 34.7,66.9 33.6,66.9 33.1,66.4 33.1,63.98 R4.1
N$5
  Top 0.2: DIPSWITCH1.B4 36.69,67.41 R5.1
N$6
  Top 0.2: BT2.21 25.91,73.97 R6.2
N$7
  Top 0.2: DIPSWITCH2.B1 2.69,67.79 2.5,67.6 2.5,59.39 R7.1
N$8
  Top 0.2: DIPSWITCH2.B2 3.96,68.06 2.9,67 2.9,61.99 R8.1
N$9
  Top 0.2: DIPSWITCH2.B3 5.23,68.73 3.4,66.9 3.4,64.49 R9.1
N$10
  Top 0.2: DIPSWITCH2.B4 6.5,67.81 R10.1
N$11
  Top 0.2: R6.1 29.12,76.35 SMDLED2.1
N$12
  Top 0.2: R1.1 58.01,73.29 SMDLED1.1
N$13
  Top 0.2: U$1.P$1 72.22,22.76 R11.2 70.2,21.2 67.85,21.2 R33.1
N$14  (via drill 0.3)
  Top 0.2: 58.75,18.15 U$2.P$2_B 59,18.4 v64.5,18.4 | U$1.P$6 74,17.95 73.5,18.45 U$1.P$2 70.85,18.45 v70.8,18.4
  Bottom 0.2: v64.5,18.4 v70.8,18.4
N$15
  Top 0.2: U$1.P$7 75.85,18.45 76.2,18.8 76.2,22.15 | 76.2,22.15 R12.1 | R35.2 80.35,20.9 77.45,20.9 76.2,22.15
N$16
  Top 0.2: U2.7 16.85,30.95
  Top 0.3: R29.1 16.85,30.95
N$17
  Top 0.3: U2.18 9.23,49.4 R30.1
N$18
  Top 0.2: R17.1 53.11,17.06 BSH201_1.GATE
N$19
  Top 0.2: U1.10 37.97,23.51 C6.1
N$20
  Top 0.2: U1.7 36.77,23.97 R18.1
N$21
  Top 0.2: U1.21 37.97,28.92 38.45,29.4 42.4,29.4 42.89,29.89 R19.1
N$22
  Top 0.4: C7.1 LM2674-5V-BUCK1.1
N$23
  Top 0.2: U$3.DRAIN 7.21,22.36 R20.2
N$24
  Top 0.2: U$4.GATE 2.42,21.76 R22.2
N$25
  Top 0.2: U$3.GATE U$4.DRAIN 2.42,16.9 2.72,16.6
  Top 0.4: U$3.GATE 5.28,19.3 5.3,19.3 5.25,19.34 | R23.1 2.72,16.6
N$26
  Top 0.2: IC1.30 58.52,53.94 C8.1
N$27
  Top 0.2: R25.2 63.02,35.55 IC1.60
N$28
  Top 0.2: C15.1 80.5,39.56 Q2.2 74.56,42.23 IC1.5
N$29
  Top 0.2: C16.1 80.68,49.22 Q2.1 74.54,46.53 74.54,42.73 IC1.6
N$30
  Top 0.2: LED_YELLOW.1 R26.1
N$31
  Top 0.2: LED_GREEN.1 R27.1
N$32
  Top 0.3: U2.17 10.5,48.9 10.6,49 13.2,49 R31.1
N$33
  Top 0.2: LED_RED.1 56.42,35.37 R28.1
N$34
  Top 0.2: U$1.P$3 71.75,17.95 71.3,17.5 69.45,17.5 R32.2
N$35
  Top 0.2: U$1.P$5 76.8,17.45 R34.1
NRST  (via drill 0.3)
  Top 0.2: IC1.7 71.41,43.23 R24.2 v70.69,44.36 | SV1.5 v69.54,37.74
  Bottom 0.2: v69.54,37.74 70.69,38.83 v70.69,44.36
OPTO1_DIODE  (via drill 0.3)
  Top 0.2: R13.2 78.64,13.74 80.8,15.9 82.6,15.9 84,17.3 v84,24 | v81,28.7 81.9,29.6 81.9,38.5 83.2,39.8 83.2,49 80,52.2 74.1,52.2 73.6,52.7 70.5,52.7 65.8,57.4 63.14,57.4 61.52,55.78 IC1.24
  Top 0.4: SKRUVPLINT_2P1.3 77.49,9.63 R13.2
  Bottom 0.2: v84,24 81,27 v81,28.7
OPTO1_OUT  (via drill 0.3)
  Top 0.2: R11.1 SMOOTHER1.1 68.4,24.93 63.83,24.93 v63.8,24.9 | v60.5,24.9 57.7,24.9 55.6,27 51,27 49.8,28.2 49.8,37.6 43.5,43.9 43.5,49.7 44.2,50.4 49.1,50.4 54.27,45.23 IC1.38
  Bottom 0.2: v63.8,24.9 v60.5,24.9
OPTO1_TRAN  (via drill 0.3)
  Top 0.2: R32.1 68.1,19.55 R33.2 65.9,17.35 65.9,15.5 | 66.86,13.94 R14.2 66.86,14.54 65.9,15.5 | 65.9,15.5 64.9,15.5 v62.7,17 | v62.7,20.1 62.7,28.4 63.3,29 74.6,29 75.5,27.9 81.4,27.9 82.3,28.8 82.3,38.3 83.6,39.6 83.6,49.2 80.2,52.6 74.3,52.6 73.8,53.1 70.7,53.1 66,57.8 62.9,57.8 61.02,55.92 IC1.25
  Top 0.4: SKRUVPLINT_2P2.3 66.86,6.33 R14.2
  Bottom 0.2: v62.7,17 v62.7,20.1
OPTO2_DIODE  (via drill 0.3)
  Top 0.2: R15.2 59.96,15.26 v61.7,17 | v80,25.2 82.7,27.9 82.7,38.1 84,39.4 84,49.4 80.4,53 74.5,53 74,53.5 70.9,53.5 66.2,58.2 62.7,58.2 60.52,56.02 IC1.26
  Top 0.4: SKRUVPLINT_2P3.3 59.96,9.45 R15.2
  Bottom 0.2: v61.7,17 61.7,20.5 62.6,21.4 71.7,21.4 73.9,23.6 78.4,23.6 v80,25.2
OPTO2_OUT  (via drill 0.3)
  Top 0.2: SMOOTHER2.1 77.24,23.01 R12.2 75.36,25.24 74.06,25.24 73,26.3 66.8,26.3 66.2,25.9 v63.8,25.9 | v55.4,25.9 54.8,26.5 50.7,26.5 49.6,27.6 49.6,27.8 49.4,28 49.4,37.4 43.1,43.7 43.1,49.9 44,50.8 49.3,50.8 54.37,45.73 IC1.37
  Bottom 0.2: v63.8,25.9 v58,25.9 v55.4,25.9
OPTO2_TRAN  (via drill 0.3)
  Top 0.2: 70.12,14.23 R16.2 70.59,14.3 | 70.59,14.3 70.59,15.39 v70.7,15.5 | R35.1 79.45,17.55 79.3,17.7 78.95,17.7 | 78.95,17.7 R34.2 | 78.95,17.7 78.5,17.7 76.9,16.1 72.39,16.1 70.59,14.3 | v80.7,24.6 83.1,27 83.1,37.9 84.4,39.2 84.4,49.6 80.6,53.4 74.7,53.4 74.2,53.9 71.1,53.9 66.4,58.6 62.5,58.6 60.02,56.12 IC1.27
  Top 0.4: SKRUVPLINT_2P4.3 70.59,6.52 R16.2
  Bottom 0.2: v70.7,15.5 71.2,16 71.2,16.9 72.7,18.4 72.7,21.4 74.1,22.8 78.9,22.8 v80.7,24.6
OPTO_TOGGLE
  Top 0.2: R17.2 49.1,20.87 49.1,27.6 49,27.7 49,37.2 42.7,43.5 42.7,50.1 43.8,51.2 49.5,51.2 54.47,46.23 IC1.36
OPTO_VDD  (via drill 0.3)
  Top 0.2: 75.59,13.96 R13.1 75.59,13.59 v74.1,12.1 | v74.1,20.76 74.1,20.17 U$1.P$8
  Top 0.4: R15.1 61.86,6.33 SKRUVPLINT_2P2.4 61.19,5.09 | 61.19,5.09 59.2,3.1 54.1,3.1 53.7,3.5 53.7,14.34 53.66,14.34 BSH201_1.DRAIN 55,16 55,20.9 | 61.19,5.09 61.19,4.61 62.8,3 73.41,3 SKRUVPLINT_2P4.4 75.59,6.52 R13.1 | 55,20.9 55,21.6 54.19,22.41 C3.1 | U$2.P$3_C 57.15,20.9 55,20.9
  Bottom 0.2: v74.1,12.1 v74.1,20.76
SPI1_MISO  (via drill 0.3)
  Top 0.2: U1.9 37.57,20.93 v38,20.4 | v38,30.5 36.5,30.5 35.6,31.4 35.6,51 38.1,53.5 44.2,53.5 47.4,56.7 v53.5,56.7 | v66.5,52 65.7,52 65.4,51.7 63.3,51.7 62.52,50.92 IC1.22
  Bottom 0.2: v38,20.4 v38,30.5 | v53.5,56.7 56,56.7 56.6,56.1 65.5,56.1 67.1,54.5 67.1,52.6 v66.5,52
SPI1_MOSI  (via drill 0.3)
  Top 0.2: U1.24 36.77,28.73 36.4,29.1 34.3,29.1 v33.9,29.5 | v36.8,31.4 36,32.1 36,50.8 38.3,53.1 44.5,53.1 47.4,56 v52.9,56 | v62.5,55.3 62.5,51.6 62.02,51.12 IC1.23
  Bottom 0.2: v33.9,29.5 33.9,30.1 34.3,30.5 35.9,30.5 v36.8,31.4 | v52.9,56 56,56 56.4,55.6 62.2,55.6 v62.5,55.3
SPI1_NSS  (via drill 0.3)
  Top 0.2: U1.22 37.57,29.53 v37.3,29.8 | v34.8,29.8 34.8,51.4 37.7,54.3 43.6,54.3 47.4,58.1 v54.7,58.1 | v66.2,50.6 66,50.8 63.6,50.8 63.52,50.72 IC1.20
  Bottom 0.2: v37.3,29.8 v34.8,29.8 | v54.7,58.1 56,58.1 57.2,56.9 65.9,56.9 68.6,54.2 68.6,50.9 68,50.3 66.5,50.3 v66.2,50.6
SPI1_SCK  (via drill 0.3)
  Top 0.2: U1.23 37.17,28.93 35.5,30.6 35.5,30.8 35.2,31.1 35.2,51.2 37.9,53.9 43.9,53.9 47.4,57.4 v54.1,57.4 | v67.6,51 66.8,51 66.5,51.3 63.5,51.3 63.02,50.82 IC1.21
  Bottom 0.2: v54.1,57.4 56,57.4 56.9,56.5 65.7,56.5 68.1,54.1 68.1,51.5 v67.6,51
SWCLK
  Top 0.2: IC1.49 56.29,37 51,37 50.3,36.3 50.3,28.3 51.2,27.4 59.4,27.4 62.6,30.6 74.8,30.6 77.16,32.96 SV1.2
SWDIO  (via drill 0.3)
  Top 0.2: v61.8,31.3 69.8,31.3 SV1.4
  Top 0.3: v53.87,40.83 54.27,41.23 IC1.46
  Bottom 0.2: v53.87,40.83 53.87,36.53 59.4,31.3 v61.8,31.3
SWO
  Top 0.2: IC1.55 60.52,37.28 61.5,36.3 61.5,32.4 61.9,32 65.32,32 SV1.6
VOUT
  Top 0.4: L-1.1 21.82,11.41 | LM2674-5V-BUCK1.8 18.9,14.05 20.22,12.73 20.22,11.08 L-1.1 | C7.2 29,14.42 29,12.7 27.38,11.08 L-1.1 | SCHOTTY-SS12-1.- 16.8,11.08 L-1.1